# Altium PCB PCB1.PcbDoc
Units mil, origin at the board's own origin, x right, y up, seen from the top; angles counter-clockwise.
Board outline 1620 x 1520 mil, 2 copper layers (Top Layer, Bottom Layer); 13 components, 50 nets, 26 pads, 0 vias.
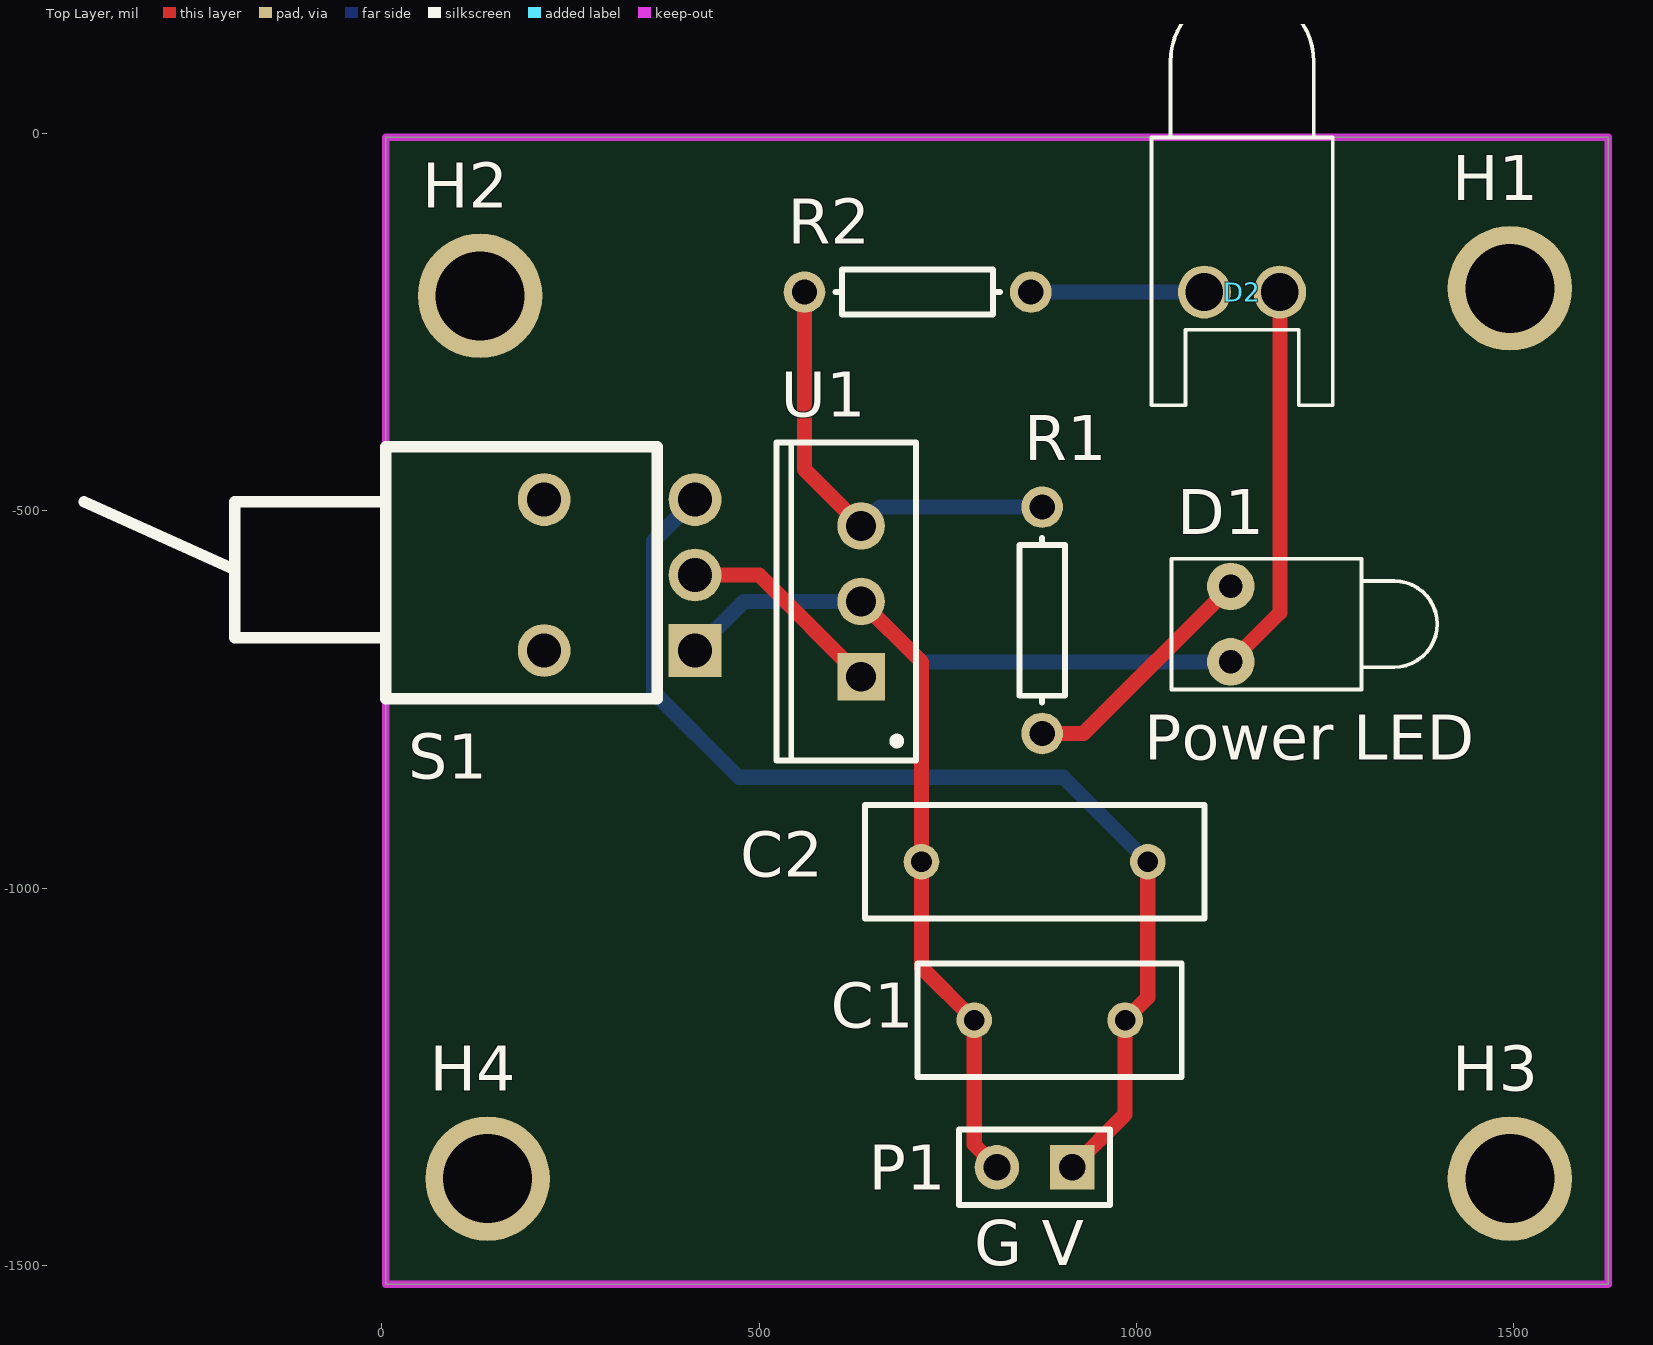
[diagram p0: Top Layer view]
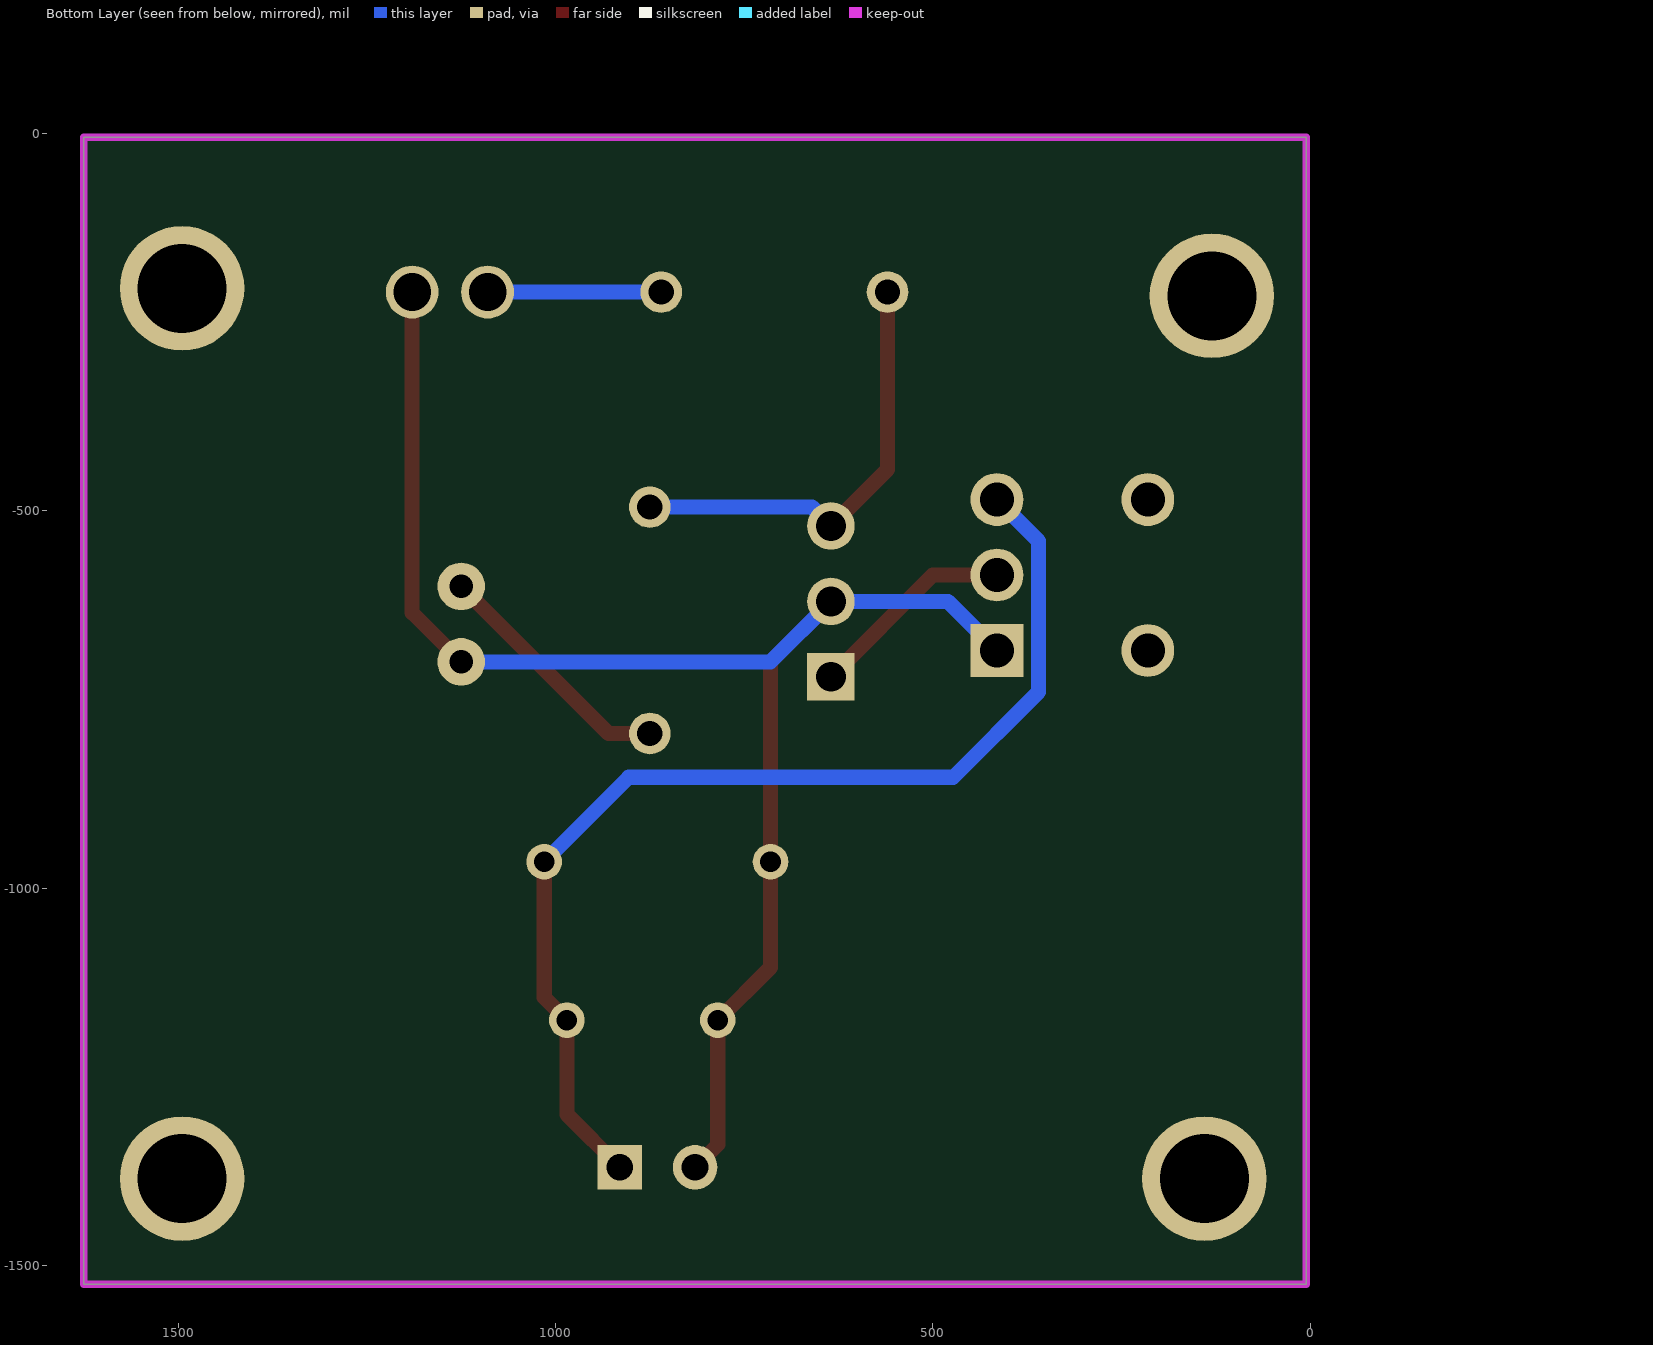
[diagram p1: Bottom Layer view, seen from below]

## Layer stack, top to bottom
Top Solder: solder mask 0.4, Solder Resist, Dk 3.5
Top Layer: signal copper 1.4
Dielectric 1: dielectric 12.6, FR-4, Dk 4.8
Bottom Layer: signal copper 1.4
Bottom Solder: solder mask 0.4, Solder Resist, Dk 3.5

## Board outline
5,-1525 5,-5 1625,-5 1625,-1525

## Design rules (kind name [scope] priority, off if disabled: settings)
Clearance [All] p1: gap=10 ignorepadtopadclearanceinfootprint=FALSE except(0: Arc-Hole Track-Hole SMDPad-Hole THPad-Hole Via-Hole Fill-Hole Poly-Hole Region-Hole Text-Hole)
PolygonConnect [All] p1: connectstyle=Relief reliefconductorwidth=10 reliefentries=4 polygonreliefangle="90 Angle" airgapwidth=10
RoutingVias [All] p1: holewidth=28 width=50 viastyle="Through Hole" minholewidth=28 minwidth=50 maxholewidth=28 maxwidth=50
SolderMaskExpansion [All] p1: expansion=4 istentingtop=FALSE
Width [All] p1: maxlimit=20 minlimit=20 preferedwidth=20
30 further rules are at their usual default settings.

## Components (designator, comment, footprint, x,y, rotation, side; value= is the part's Value field where it differs from the comment)
C1 "Cap Pol1" RAD-0.2 885,-1175 r180 top value=100uF
C2 "Cap" RAD-0.3 865,-965 r0 top value=100nF
D1 "LED1" LED-1 1125,-650 r0 top
D2 "LED0" LED-0 1140,-210 r180 top
H1 "Hole 3mm" "Hole 3mm" 1495,-205 r0 top
H2 "Hole 3mm" "Hole 3mm" 130,-215 r0 top
H3 "Hole 3mm" "Hole 3mm" 1495,-1385 r0 top
H4 "Hole 3mm" "Hole 3mm" 140,-1385 r0 top
P1 "Header 2" HDR1X2 915,-1370 r180 top
R1 "Res1" AXIAL-0.3 875,-645 r270 top value=1k
R2 "Res1" AXIAL-0.3 710,-210 r0 top value=10
S1 "SW-SPDT" "SW DPST jameco" 416.89,-587.36 r270 top
U1 "LM2940CT-5.0" T03B 635,-620 r90 top

## Footprints (in the part's own frame and the unit in brackets; to place one, negate y for a bottom-side part, rotate by r counter-clockwise, add the part's x,y. Pads: shape width x height; smd on the part's side, far side on the other; paste and mask are expansions set on the pad)
AXIAL-0.3 [mm] "Axial Device, Thru-Hole; 2 Leads; 0.3 in Pin Spacing"
  round 1.4 hole 0.85: 1(-3.81,0) 2(3.81,0)
  silkscreen extent -2.77,-0.76 2.77,0.76
HDR1X2 [mm] "Connector; Header; 2 Position"
  rect 1.5x1.5 hole 0.9: 1(0,0)
  round 1.5 hole 0.9: 2(2.54,0)
  silkscreen extent -1.27,-1.27 3.81,1.27
"Hole 3mm" [mil]
  round 165 hole 118.11: 1(0,0)
LED-0 [mil] "LED; 2 Leads"
  round 70 hole 50: 1(50,0) 2(-50,0)
  silkscreen extent -120,-400 120,150
LED-1 [mm] "LED; 2 Leads"
  round 1.6 hole 0.8: 1(0,1.27) 2(0,-1.27)
  silkscreen extent -2,-2.2 6.95,2.2
RAD-0.2 [mm] "Radial Cap, Thru-Hole; 2 Leads; 0.2 in Pin Spacing"
  round 1.2 hole 0.7: 1(-2.54,0) 2(2.54,0)
  silkscreen extent -4.44,-1.91 4.44,1.91
RAD-0.3 [mm] "Radial Cap, Thru-Hole; 2 Leads; 0.3 in Pin Spacing"
  round 1.2 hole 0.7: 1(-3.81,0) 2(3.81,0)
  silkscreen extent -5.71,-1.91 5.71,1.91
"SW DPST jameco" [mil]
  rect 70x70 hole 45: 1(97.64,-1.89)
  round 70 hole 45: 2(-2.36,-1.89) 3(-102.36,-1.89) 4(-102.36,-201.89) 5(97.64,-201.89)
  silkscreen extent -172,-812 162,-52
T03B [mm]
  rect 1.6x1.6 hole 1: 1(-2.54,0)
  round 1.6 hole 1: 2(0,0) 3(2.54,0)
  silkscreen extent -5.35,-1.85 5.35,2.85, body extent -5.4,-1.9 5.4,2.9, height 19.4

## Part data
C1: "Polarized Capacitor (Radial)", LatestRevisionDate=17-Jul-2002, LatestRevisionNote="Re-released for DXP Platform.", PackageDescription="Polarized Capacitor (Radial); 2 Leads", PackageReference=RB7.6-15, Published=8-Jun-2000, Publisher="Altium Limited"
C2: "Capacitor", LatestRevisionDate=17-Jul-2002, LatestRevisionNote="Re-released for DXP Platform.", PackageDescription="Radial Cap, Thru-Hole; 2 Leads; 0.3 in Pin Spacing", PackageReference=RAD-0.3, Published=8-Jun-2000, Publisher="Altium Limited"
D1: "Typical RED GaAs LED", LatestRevisionDate=08-Jul-2005, LatestRevisionNote="Mech Layer 1 removed.", PackageDescription="LED; 2 Leads", PackageReference=LED-1, Published=8-Jun-2000, Publisher="Altium Limited"
D2: "Typical INFRARED GaAs LED", LatestRevisionDate=08-Jul-2005, LatestRevisionNote="Mech Layer 1 removed.", PackageDescription="LED; 2 Leads", PackageReference=LED-0, Published=8-Jun-2000, Publisher="Altium Limited"
P1: "Header, 2-Pin", LatestRevisionDate=17-Jul-2002, LatestRevisionNote="Re-released for DXP Platform.", Publisher="Altium Limited"
R1 R2: "Resistor", LatestRevisionDate=17-Jul-2002, LatestRevisionNote="Re-released for DXP Platform.", PackageDescription="Axial Device, Thru-Hole; 2 Leads; 0.3 in Pin Spacing", PackageReference=AXIAL-0.3, Published=8-Jun-2000, Publisher="Altium Limited"
S1: "SPDT Subminiature Toggle Switch, Right Angle Mounting, Vertical Actuation", ComponentLink1Description="Manufacturer Link", ComponentLink1URL=http://www.apem.com, DatasheetVersion=05-Dec-2000, LatestRevisionDate=17-Dec-2003, LatestRevisionNote="Schematic revised, PCB Footprint replaced.", PackageDescription="Switch; 4 Leads", PackageReference=TL36WW15050, Published=24-Mar-1999, Publisher="Altium Limited"
U1: library part LM2940CT-5.0_1, "1A Low Dropout Regulator, 3-pin TO-220", Manufacturer="National Semiconductor", PackageTopMarking="NSUZXYTTE#*LM2940CT*-5.0 P+", PowerWise=N, ComponentLink1Description="Manufacturer URL", ComponentLink1URL=http://www.national.com/, ComponentLink2Description="LM2940C Datasheet", ComponentLink2URL=http://www.national.com/ds/LM/LM2940C.pdf, ComponentLink3Description="LM2940C Web Page", ComponentLink3URL=http://www.national.com/pf/LM/LM2940C.html, ComponentLink4Description="T03B Package Page", ComponentLink4URL=http://www.national.com/packaging/folders/t03b.html, CompType="LDO IC", DatasheetVersion=Jan-2007, High-Reliability=Y, PackageDescription="TO-220, Molded, 3 Lead, Straight", PackageReference=T03B, PackageVersion="revL, Jan-1992", PartNumber=LM2940CT-5.0, PinCount=3, RoHS=N

## Nets (pads, with @x,y where several pads share a name; then routed paths per layer and width w, separated by ;. In a path a pad name is that pad's centre, name@x,y a point inside that pad or via, vN(x,y) a via of type N, cw(c..) or ccw(c..) an arc to the next point about the centre after c; other vN are vias at no path point)
5V: R1.1 R2.1 U1.3 | length 591.4
  Top Layer w20: R2.1 560,-445 U1.3
  Bottom Layer w20: U1.3 660,-495 R1.1
+5: C1.1 C2.2 P1.1 S1.3 | length 1472.4
  Top Layer w20: P1.1 985,-1300 C1.1 1015,-1145 C2.2
  Bottom Layer w20: S1.3 360,-540 360,-740 473,-853 903,-853 C2.2
-5: 
GND: C1.2 C2.1 D1.2 D2.2 P1.2 S1.1 U1.2 | length 2111.5
  Top Layer w20: U1.2 715,-700 C2.1 715,-1105 C1.2 785,-1340 P1.2 ; D1.2 1190,-635 D2.2
  Bottom Layer w20: S1.1 480,-620 U1.2 715,-700 D1.2
NetC5_2: 
NetC10_1: 
NetC10_2: 
NetD1_1: D1.1 R1.2 | length 330.8
  Top Layer w20: R1.2 930,-795 D1.1
NetD2_1: D2.1 R2.2 | length 230
  Bottom Layer w20: R2.2 D2.1
NetD3_1: 
NetD4_1: 
NetDS1_3: 
NetDS1_4: 
NetDS1_6: 
NetDS1_11: 
NetDS1_12: 
NetDS1_13: 
NetDS1_14: 
NetIC1_1: 
NetIC1_2: 
NetIC1_3: 
NetIC1_4: 
NetIC1_5: 
NetIC1_6: 
NetIC1_7: 
NetIC1_8: 
NetIC1_9: 
NetIC1_10: 
NetIC1_13: 
NetIC1_14: 
NetIC1_15: 
NetIC1_16: 
NetIC1_17: 
NetIC1_18: 
NetIC1_23: 
NetIC1_24: 
NetIC1_25: 
NetIC1_26: 
NetIC1_28: 
NetIC1_29: 
NetIC1_33: 
NetIC1_34: 
NetIC1_35: 
NetIC1_36: 
NetIC1_37: 
NetIC1_38: 
NetIC1_39: 
NetIC1_40: 
NetR8_1: 
NetS1_2: S1.2 U1.1 | length 275.9
  Top Layer w20: S1.2 500,-585 U1.1
pads on no net: H1.1 H2.1 H3.1 H4.1 S1.4 S1.5

## Keep-outs
Keep-Out Layer:
  the board outline again, w10

## Silkscreen, mask and mechanical layers (free items; w line width, h text height)
Top Overlay:
  text "Power LED" at 1010,-830 h60
  text "G V" at 785,-1500 h60